# Altium PCB CANShield.PcbDoc
Units mil, origin at the board's own origin, x right, y up, seen from the top; angles counter-clockwise.
Board outline 2600 x 2086.61 mil, 2 copper layers (Top Layer, Bottom Layer), stack 61.756 mil thick; 20 components, 26 nets, 112 pads, 6 vias.
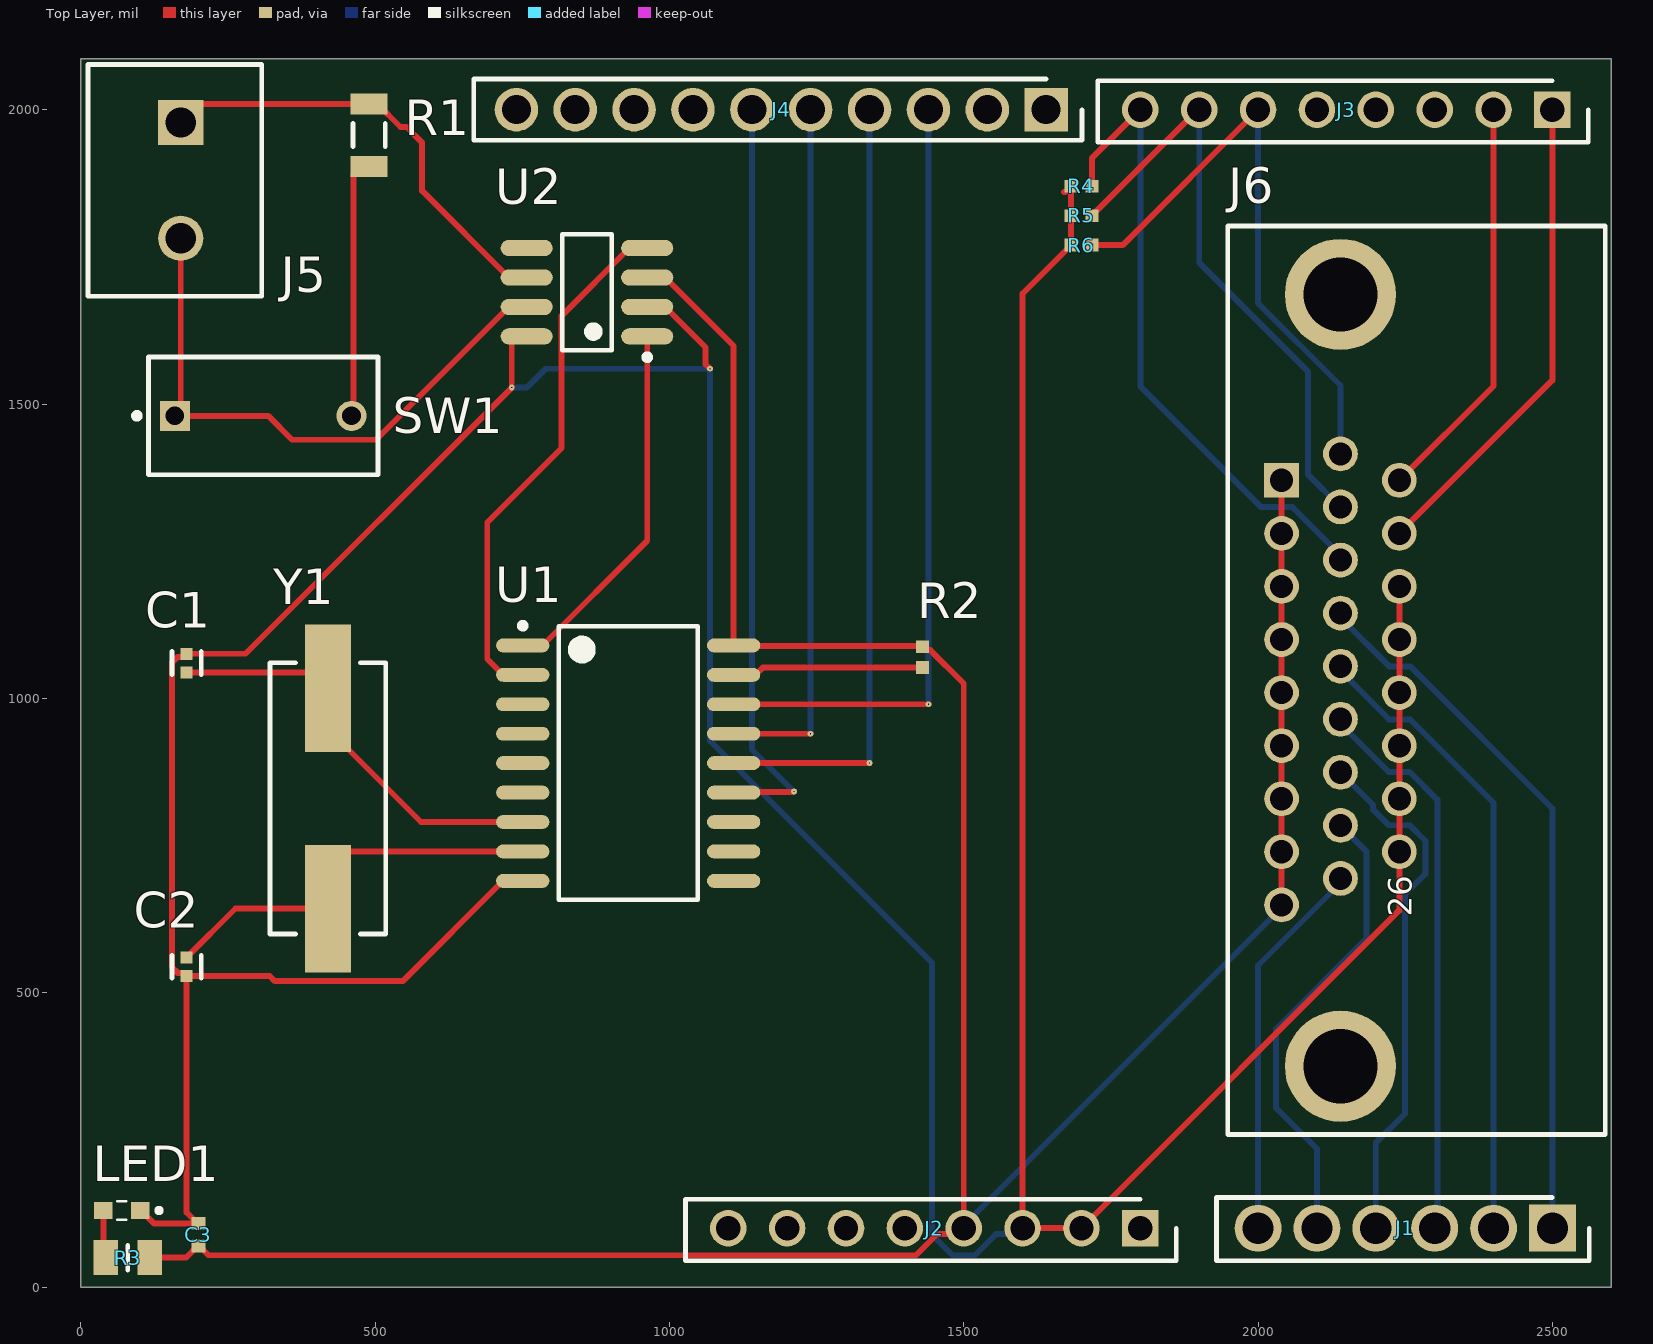
[diagram p0: Top Layer view]
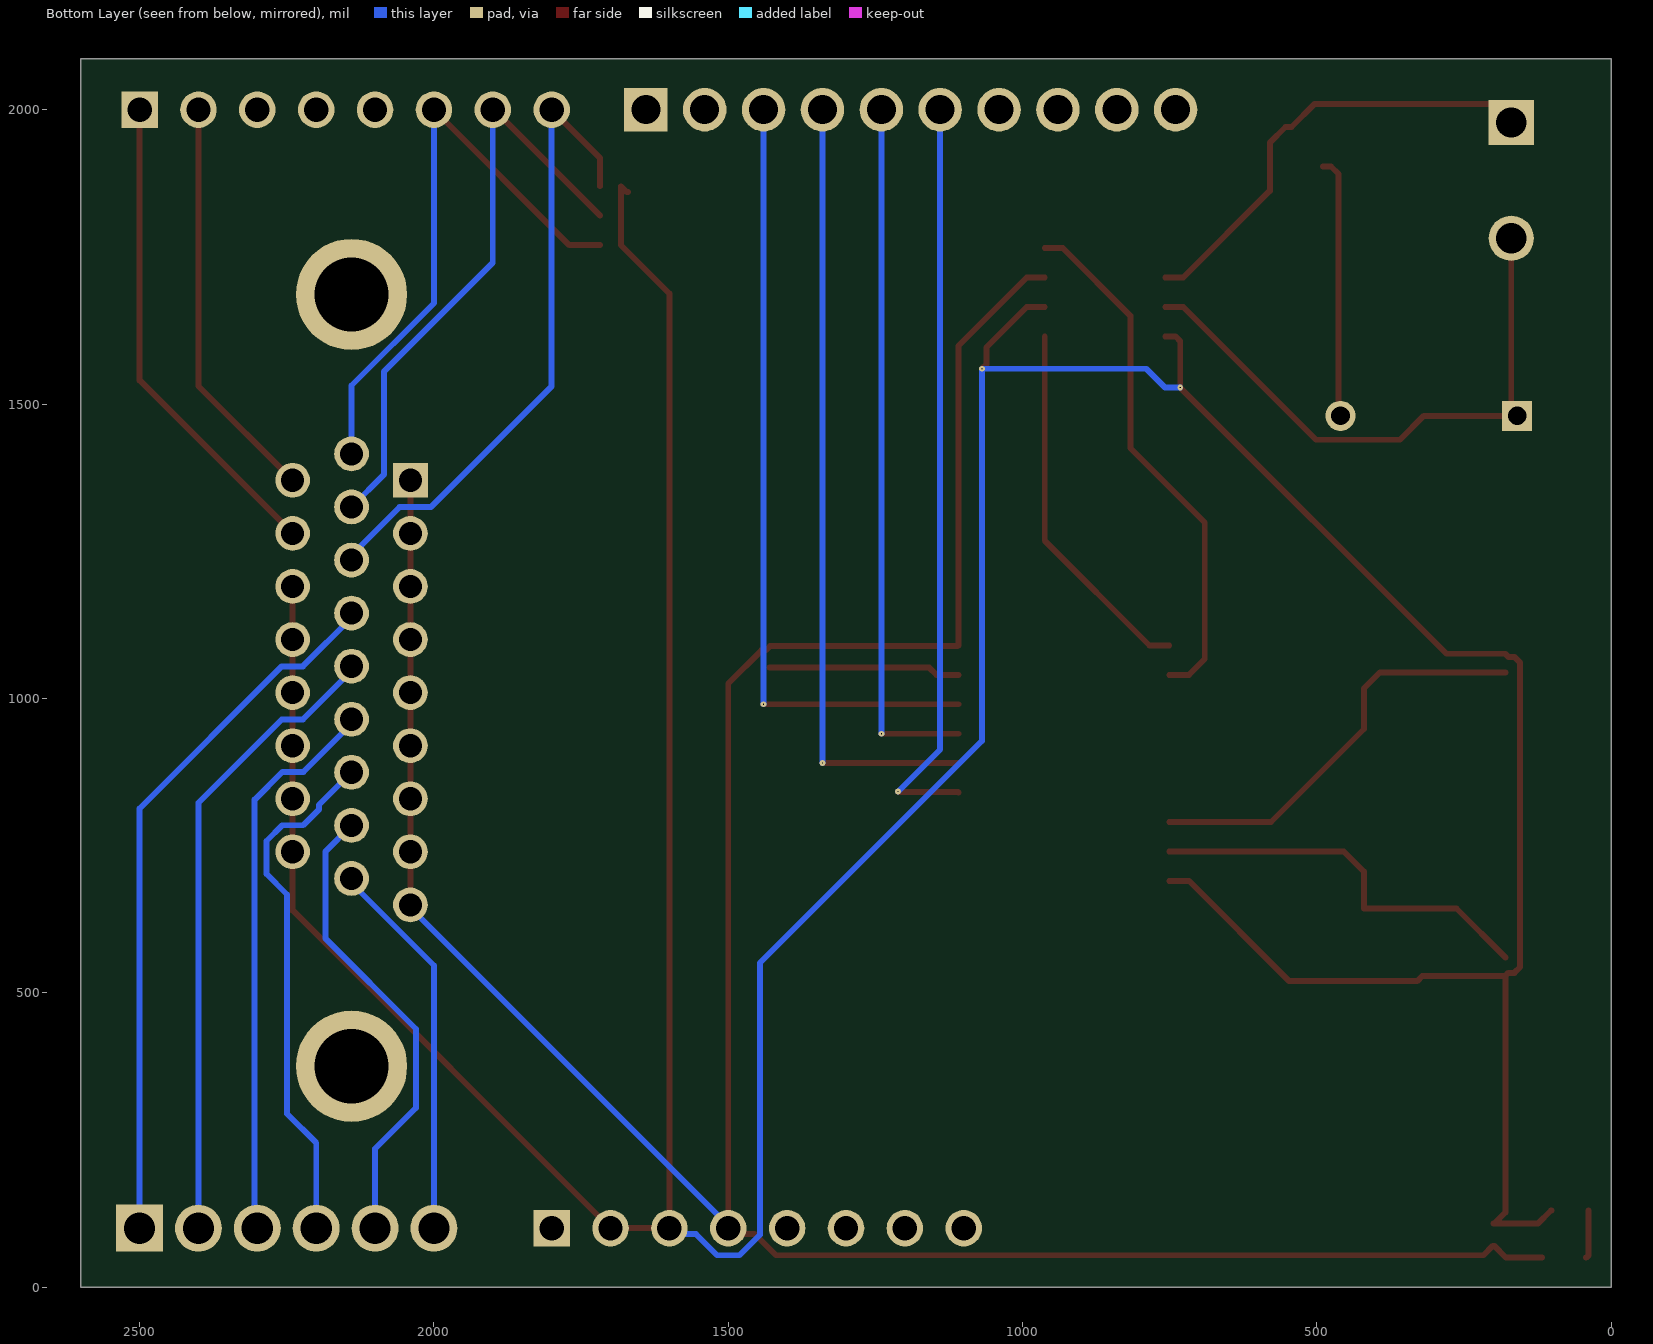
[diagram p1: Bottom Layer view, seen from below]

## Layer stack, top to bottom
Top Solder: solder mask 1, SM-001, Dk 4
Top Layer: signal copper 1.378
Dielectric 1: core 59, Core-043, Dk 4.3
Bottom Layer: signal copper 1.378
Bottom Solder: solder mask 1, SM-001, Dk 4

## Board outline
0,0 2600,0 2600,2086.61 0,2086.61

## Design rules (kind name [scope] priority, off if disabled: settings)
Clearance [All] p1: gap=10 ignorepadtopadclearanceinfootprint=FALSE except(0: Arc-Hole Track-Hole SMDPad-Hole THPad-Hole Via-Hole Fill-Hole Poly-Hole Region-Hole Text-Hole)
PolygonConnect [All] p1: connectstyle=Relief reliefconductorwidth=10 reliefentries=4 polygonreliefangle="90 Angle" airgapwidth=10
RoomDefinition CANShield [InComponentClass('CANShield')] p1: confinementstyle=ConfineIn formatcopy=TRUE lockcomponents=FALSE outline 0,0 2600,0 2600,2090 0,2090
RoutingVias [All] p1: holewidth=28 width=50 viastyle="Through Hole" minholewidth=28 minwidth=50 maxholewidth=28 maxwidth=50
SolderMaskExpansion [All] p1: expansion=4 istentingtop=FALSE
Width [All] p1: maxlimit=10 minlimit=10 preferedwidth=10
30 further rules are at their usual default settings.

## Components (designator, comment, footprint, x,y, rotation, side; value= is the part's Value field where it differs from the comment)
C1 "C0402C220J8HACTU" FP-C0402-BB-MFG 180,1060 r270 top value="22 pF"
C2 "C0402C220J8HACTU" FP-C0402-BB-MFG 180,544.25 r90 top value="22 pF"
C3 "10 uF" CAPC1005X55N 200,88.9 r270 top
J1 "PRT-09280" SHDR6W80P0X254_1X6_1579X250X865P 2500,100 r180 top
J2 "PRT-09279" SHDR8W87P0X254_1X8_2087X250X865P 1800,100 r180 top
J3 "PRT-09279" SHDR8W87P0X254_1X8_2087X250X865P 2500,2000 r180 top
J4 "PRT-11376" SHDR10W107P0X254_1X10_2595X250X865P 1640,2000 r180 top
J5 "691137710002" 691137710002 160,1880 r270 top
J6 "618026330923" 618026330923 2269.13,1030.71 r90 top
LED1 "150060RS55040" 150060RS55040 70,130 r180 top
R1 "120" RESC3216X60X45LL10T20 490,1956.85 r90 top
R2 "CRCW040210K0FKED" RESC1005X40X25NL05T05 1430,1070 r90 top
R3 "1k" RESC2013X55N 80,50 r180 top
R4 "CRCW040210K0FKED" RESC1005X40X25NL05T05 1700,1870 r0 top
R5 "CRCW040210K0FKED" RESC1005X40X25NL05T05 1700,1820 r0 top
R6 "CRCW040210K0FKED" RESC1005X40X25NL05T05 1700,1770 r0 top
SW1 "5161390-1" FP-5161390-1-MFG 310,1480 r270 top
U1 "MCP2515T-I/SO" SOIC-SO18_N 930,890 r0 top
U2 "TJA1050T/CM,118" NXP-SOT96-1_M 860,1690 r180 top
Y1 "FOXSDLF/080-20" FOX-HC49SDLF_V 420,830 r270 top

## Footprints (in the part's own frame and the unit in brackets; to place one, negate y for a bottom-side part, rotate by r counter-clockwise, add the part's x,y. Pads: shape width x height; smd on the part's side, far side on the other; paste and mask are expansions set on the pad)
150060RS55040 [mm]
  rect 0.8x0.75 smd: 1(-0.8,0) 2(0.8,0)
  silkscreen extent -1.7,-0.4 0.2,0.4
618026330923 [mm] "26 pins, right angled"
  rect 1.5x1.5 hole 1: 1(8.63,5.82)
  round 1.5 hole 1: 2(6.34,5.82) 3(4.05,5.82) 4(1.76,5.82) 5(-0.53,5.82) 6(-2.82,5.82) 7(-5.11,5.82) 8(-7.4,5.82) 9(-9.69,5.82) 10(9.77,3.28) 11(7.48,3.28) 12(5.19,3.28) 13(2.9,3.28) 14(0.61,3.28) 15(-1.68,3.28) 16(-3.97,3.28) 17(-6.26,3.28) 18(-8.55,3.28) 19(8.63,0.74) 20(6.34,0.74) 21(4.05,0.74) 22(1.76,0.74) 23(-0.53,0.74) 24(-2.82,0.74) 25(-5.11,0.74) 26(-7.4,0.74)
  round 4.8 hole 3.2: M1(-16.65,3.28) M2(16.65,3.28)
  silkscreen extent -19.6,-8.15 19.6,8.15, body extent -19.6,-14.15 19.6,8.15, height 12.55
691137710002 [mm] "Horizontal Cable Entry with Pressure Clamp, pitch 5mm, 02p"
  rect 1.95x1.95 hole 1.3: 1(-2.5,0.25)
  round 1.95 hole 1.3: 2(2.5,0.25)
  silkscreen extent -5,-3.75 5,3.75, body extent -5,-3.75 5,3.75, height 11.6
CAPC1005X55N [mm]
  rect 0.56x0.62 smd: 1(-0.48,0) 2(0.48,0)
  body extent -0.5,-0.25 0.5,0.25, height 0.55
FOX-HC49SDLF_V [mm] "SMD, 2-Leads, Body 5x11.7mm"
  rect 5.5x2 smd: 1(-4.75,0) 2(4.75,0)
  silkscreen extent -5.85,-2.5 5.85,2.5, body extent -6.15,-2.35 6.15,2.35, height 4.34
FP-5161390-1-MFG [mm]
  rect 1.3x1.3 hole 0.8 paste-1000 mask+0: 1(0,-3.81)
  round 1.3 hole 0.8 paste-1000 mask+0: 2(0,3.81)
  silkscreen extent -2.54,-5.57 2.54,4.95, body extent -2.64,-5.05 2.64,5.05, height 0.25
FP-C0402-BB-MFG [mm]
  rect 0.52x0.52 smd paste+0 mask+0: 1(-0.4,0) 2(0.4,0)
  silkscreen extent -0.5,-0.64 0.5,0.64, body extent -0.8,-0.4 0.8,0.4, height 0.25
NXP-SOT96-1_M [mm] "SOIC, 8-Leads, Body 5x4mm, Pitch 1.27mm, IPC Low Density"
  oval 2.25x0.7 smd: 1(-2.6,1.905) 2(-2.6,0.635) 3(-2.6,-0.635) 4(-2.6,-1.905) 5(2.6,-1.905) 6(2.6,-0.635) 7(2.6,0.635) 8(2.6,1.905)
  silkscreen extent -2.73,-2.5 1.07,2.93, body extent -2,-2.5 2,2.5, height 1.75
RESC1005X40X25NL05T05 [mm] "Chip Resistor, 2-Leads, Body 1.00x0.50mm, IPC Medium Density"
  rect 0.55x0.55 smd: 1(-0.45,0) 2(0.45,0)
  body extent -0.53,-0.27 0.53,0.28, height 0.4
RESC2013X55N [mm]
  rect 1.05x1.5 smd: 1(-0.95,0) 2(0.95,0)
  silkscreen extent 0,-0.54 0,0.54, body extent -1,-0.64 1,0.64, height 0.55
RESC3216X60X45LL10T20 [mm] "Chip Resistor, 2-Leads, Body 3.20x1.60mm, IPC High Density"
  rect 0.9x1.6 smd: 1(-1.35,0) 2(1.35,0)
  silkscreen extent -0.5,-0.7 0.5,0.7, body extent -1.65,-0.85 1.65,0.85, height 0.6
SHDR6W80P0X254_1X6_1579X250X865P [mm]
  rect 2.025x2.025 hole 1.35: 1(0,0)
  round 2.025 hole 1.35: 2(2.54,0) 3(5.08,0) 4(7.62,0) 5(10.16,0) 6(12.7,0)
  silkscreen extent -1.6,-1.33 14.5,1.4
SHDR8W87P0X254_1X8_2087X250X865P [mm]
  rect 1.575x1.575 hole 1.05: 1(0,0)
  round 1.575 hole 1.05: 2(2.54,0) 3(5.08,0) 4(7.62,0) 5(10.16,0) 6(12.7,0) 7(15.24,0) 8(17.78,0)
  silkscreen extent -1.54,-1.25 19.63,1.4
SHDR10W107P0X254_1X10_2595X250X865P [mm]
  rect 1.875x1.875 hole 1.25: 1(0,0)
  round 1.875 hole 1.25: 2(2.54,0) 3(5.08,0) 4(7.62,0) 5(10.16,0) 6(12.7,0) 7(15.24,0) 8(17.78,0) 9(20.32,0) 10(22.86,0)
  silkscreen extent -1.54,-1.33 24.71,1.33
SOIC-SO18_N [mm] "SOIC, 18-Leads, Body 11.6x7.5mm, Pitch 1.27mm, IPC Medium Density"
  oval 2.3x0.6 smd: 1(-4.55,5.08) 2(-4.55,3.81) 3(-4.55,2.54) 4(-4.55,1.27) 5(-4.55,0) 6(-4.55,-1.27) 7(-4.55,-2.54) 8(-4.55,-3.81) 9(-4.55,-5.08) 10(4.55,-5.08) 11(4.55,-3.81) 12(4.55,-2.54) 13(4.55,-1.27) 14(4.55,0) 15(4.55,1.27) 16(4.55,2.54) 17(4.55,3.81) 18(4.55,5.08)
  silkscreen extent -4.67,-5.9 3,6.05, body extent -3.8,-5.87 3.8,5.87, height 2.65

## Part data
C1 C2: library part CMP-03020-002266-1, "C0402 22 pF X8R 5.00% 10 V", Capacitance="22 pF", Manufacturer=Kemet, Package=C0402-BB, Temperature="-55°C to +125°C", Temperature Characteristic=X8R, Temperature Coefficient=15%, Temperature Range High=+125°C, Temperature Range Low=-55°C, Tolerance=0.05, Voltage Rating="10 V", Automotive=No, Category=Cap, ComponentLink2Description=Datasheet, ComponentLink2URL=https://content.kemet.com/datasheets/KEM_C1002_X7R_SMD.pdf, Device Class L1="Passive Components", Device Class L2=Capacitors, Device Class L3="Ceramic Capacitors", Height=0.55mm, Ipc Land Pattern Name=CAPC10050X50, Lead Free=Yes, Manufacturer Part Number=C0402C220J8HACTU, Material=Ceramic, Octopart=https://octopart.com/c0402c220j8hactu-kemet-88724303, RoHS=TRUE
C3: library part 0402X106M6R3CT, "Capacitor", Manufacturer_Name="Walsin Technology Corporation", Mouser Part Number=791-0402X106M6R3CT, Arrow Part Number=0402X106M6R3CT, Datasheet Link=https://mouser.componentsearchengine.com/Datasheets/1/0402X106M6R3CT.pdf, Height=0.55mm, Manufacturer_Part_Number=0402X106M6R3CT, Mouser Price/Stock=https://www.mouser.co.uk/ProductDetail/Walsin/0402X106M6R3CT?qs=K66U1JmYfS7Y7bXr0va0Xw%3D%3D
J1: "Connector", Manufacturer_Name=SparkFun, Mouser Part Number=474-PRT-09280, Arrow Part Number=PRT-09280, Arrow Price/Stock=https://www.arrow.com/en/products/prt-09280/sparkfun-electronics, Datasheet Link=https://www.sparkfun.com/products/9280, Height=8.65mm, Manufacturer_Part_Number=PRT-09280, Mouser Price/Stock=https://www.mouser.co.uk/ProductDetail/SparkFun/PRT-09280?qs=WyAARYrbSnZbYI2JbCpVjQ%3D%3D
J2 J3: "Capacitor", Manufacturer_Name=SparkFun, Mouser Part Number=474-PRT-09279, Arrow Part Number=PRT-09279, Arrow Price/Stock=https://www.arrow.com/en/products/prt-09279/sparkfun-electronics, Datasheet Link=https://cdn.sparkfun.com/datasheets/Prototyping/SP-140520-XX-001.pdf, Height=8.65mm, Manufacturer_Part_Number=PRT-09279, Mouser Price/Stock=https://www.mouser.co.uk/ProductDetail/SparkFun/PRT-09279?qs=WyAARYrbSnZoWn%2FpXY8lrw%3D%3D
J4: "Capacitor", Manufacturer_Name=SparkFun, Mouser Part Number=474-PRT-11376, Arrow Part Number=PRT-11376, Arrow Price/Stock=https://www.arrow.com/en/products/prt-11376/sparkfun-electronics, Datasheet Link=https://cdn.sparkfun.com/datasheets/Prototyping/SP-140520-XX-001.pdf, Height=8.65mm, Manufacturer_Part_Number=PRT-11376, Mouser Price/Stock=https://www.mouser.co.uk/ProductDetail/SparkFun/PRT-11376?qs=WyAARYrbSnZQXyABk0oWeA%3D%3D
J5: library part CMP-1502-03324-1, "Series 1377 - 5.00 mm Horizontal Entry with Pressure Clamp WR-TBL, 2 pin", Manufacturer="Wurth Elektronik", Operating Temperature=-30to120degC, Datasheet URL=http://katalog.we-online.de/pbs/datasheet/691137710002.pdf, Manufacturer URL=http://www.we-online.de, Mounting Technology=THT, Package Reference=691137710002, Packaging=Box, Part Number=691137710002, Pin Number=2, Pitch=5.00mm, Publisher=WurthElektronik
J6: library part CMP-1502-00217-1, "Female High Density PCB Connector with Hex Screw WR-DSUB, Angled, 26 pins", Contact Resistance=30mOhm, Manufacturer="Wurth Elektronik", Operating Temperature=-40to85degC, Rated Current=3A, Working Voltage=60VAC, Datasheet URL=https://katalog.we-online.de/em/datasheet/6180xx330923.pdf, Gender=Female, Manufacturer URL=http://www.we-online.de, Mounting Technology=THT, Orientation=Angled, Package Reference=618026330923, Packaging=Tray, Part Number=618026330923, Pin Number=26, Publisher=WurthElektronik
LED1: "LED", Manufacturer_Name="Wurth Elektronik", Mouser Part Number=710-150060RS55040, Arrow Part Number=150060RS55040, Datasheet Link=http://katalog.we-online.de/led/datasheet/150060RS55040.pdf, Height=0mm, Manufacturer_Part_Number=150060RS55040, Mouser Price/Stock=https://www.mouser.co.uk/ProductDetail/Wurth-Elektronik/150060RS55040?qs=8Aam6%252B7C6HHnMZFlrlTntA%3D%3D
R1: library part CMP-2003-04838-1, Manufacturer="Vishay Dale", Part Number=CRCW1206120RFKEA
R2 R4 R5 R6: library part CMP-2002-08135-1, Manufacturer="Vishay Dale", Part Number=CRCW040210K0FKED
R3: library part RGA2012P-102-B-T1, "Resistor", Manufacturer_Name=Susumu, Mouser Part Number=754-RGA2012P-102BT1, Arrow Part Number=RGA2012P-102-B-T1, Datasheet Link=https://componentsearchengine.com/Datasheets/1/RGA2012P-102-B-T1.pdf, Height=0.55mm, Manufacturer_Part_Number=RGA2012P-102-B-T1, Mouser Price/Stock=https://www.mouser.co.uk/ProductDetail/Susumu/RGA2012P-102-B-T1?qs=bZr6mbWTK5kDA0FAdzRgYA%3D%3D
SW1: library part CMP-03400-000007-1, "Switch DIP OFF ON SPST 1 Top Slide 25A 50VDC PC Pins 2.54mm Thru-Hole Box/Carton", Contact Current Rating=25mA, Manufacturer=TE, Temperature="-25°C to +70°C", Temperature Range High=+70°C, Temperature Range Low=-25°C, Voltage Rating Dc=50V, Automotive=No, Category=Switch, ComponentLink2Description=Datasheet, ComponentLink2URL=https://www.te.com/usa-en/product-5161390-1.html?te_bu=Cor&te_type=other&te_campaign=oct_glo_cor-oct-global-oth-prtnr-fy19-oct-octo-buy-bom_sma-298_2&elqCampaignId=35216, Device Class L1=Electromechanical, Device Class L2=Switches, Device Class L3="DIP Switches", Electromechanical Life=2000Cycles, Height=8.5mm, Lead Free=Yes, Manufacturer Part Number=5161390-1, Mount="Through Hole", Mouser Description="Switch DIP OFF ON SPST 1 Top Slide 25A 50VDC PC Pins 2.54mm Thru-Hole Box/Carton", Number Of Circuits=1, Octopart=https://octopart.com/5161390-1-te+connectivity-46507634, Package=5161390-1, RoHS=TRUE, Throw Configuration=SPST
U1: library part CMP-0186-00139-2, "Stand-Alone CAN Controller With SPI Interface, 18-Pin SOIC, Industrial Temperature, Tape and Reel", Code_JEDEC=MS-013, ComponentLink1Description="Manufacturer URL", ComponentLink1URL=http://www.microchip.com/, ComponentLink2Description=Datasheet, ComponentLink2URL=http://ww1.microchip.com/downloads/en/DeviceDoc/21801f.pdf, ComponentLink3Description="Package Specification", ComponentLink3URL=http://www.microchip.com/stellent/groups/techpub_sg/documents/packagingspec/en012702.pdf, DatasheetVersion="revF, Oct-2010", PackageDescription="18-Lead Plastic Small Outline (SO) - Wide 7.50mm Body [SOIC]", PackageReference=SOIC-SO18, PackageVersion="revBB, Aug-2009", RevisionNote="URLs added. DatasheetVersion updated."
U2: library part CMP-2000-04923-1, "High speed CAN transceiver, 4.75 to 5.25 V, -40 to 150 degC, 8-Pin SO (SOT96-1), RoHS, Tape and Reel", Manufacturer="NXP Semiconductors", Package / Case="8-SOIC(0.154\",3.90mmWidth)", Package Description="8-Pin Small Outline Integrated Circuit, Body 4.9 x 3.9 mm, Pitch 1.27 mm", Package Reference=SOT96-1, Standard Package=1, Supplier Device Package=8-SO, Voltage - Supply=4.75V~5.25V, <PCN>=http://media.digikey.com/pdf/PCNs/NXP/201209019F04_TJA1050_Obs.pdf, Category=IntegratedCircuits(ICs), Datasheet URL=http://www.nxp.com/documents/data_sheet/TJA1050.pdf, Datasheet Version="Rev. 4, 10/2003", Duplex=Half, Dynamic Catalog=CANTransceivers, Family=Interface-Drivers,Receivers,Transceivers, Manufacturer URL=http://www.nxp.com/, Minimum Quantity=Transceiver, Mounting Type=SurfaceMount, Number of Drivers/Receivers=1/1, Other Names=568-10292-1, Package/Case="8-SOIC(0.154\",3.90mmWidth)", Packaging=CutTape(CT), PCN Obsolescence="TJA105028/Apr/2013 /  / MultipleDevices19/Apr/2013", PCN Packaging=LighterPackingReels30/Mar/2014, Product Training Modules=CANandLINBusTransceiver, Protocol=CAN, Quantity Available=CutTape(CT)AlternatePackaging, Receiver Hysteresis=70mV, Type=Transceiver
Y1: library part CMP-2100-03639-1, "Resistance Weld Crystal, 8 MHz, +/- 30 ppm, -20 to 70 degC, 2-Pin SMD, RoHS, Tape and Reel", Case/Package=SMD/SMT, ESR (Equivalent Series Resistance)=80Ohm, Frequency=8MHz, Frequency Stability=50ppm, Frequency Tolerance=30ppm, Load Capacitance=20pF, Manufacturer="FOX Electronics", Max Operating Temperature=70degC, Min Operating Temperature=-20degC, Package Description="2-Pin Surface Mount Device, Body 5 x 11.7 mm", Package Quantity=1000, Package Reference=HC49SDLF, Datasheet URL=http://www.foxonline.com/pdfs/hc49sdlf.pdf, Datasheet Version=42064.0, Depth=5mm, Height=4.5mm, Lead Free=LeadFree, Length=11.7mm, Manufacturer URL=http://www.foxonline.com/, Mount=SurfaceMount, Number of Pins=2, Packaging=TapeandReel, Radiation Hardening=No, REACH SVHC=NoSVHC, RoHSCompliant=True, Series Resistance=80Ohm, Termination=SMD/SMT, Tolerance=50ppm, Width=5mm

## Via types
v1: diameter 10, hole 0, Top Layer to Bottom Layer, 6 vias

## Nets (pads, with @x,y where several pads share a name; then routed paths per layer and width w, separated by ;. In a path a pad name is that pad's centre, name@x,y a point inside that pad or via, vN(x,y) a via of type N, cw(c..) or ccw(c..) an arc to the next point about the centre after c; other vN are vias at no path point)
+5: C3.2 J2.4 J6.1 J6.2 J6.3 J6.4 J6.5 J6.6 J6.7 J6.8 J6.9 R2.2 R3.1 U1.18 U2.3 | length 4961.9
  Top Layer w10: R3.1 178.82,50 198.82,70 C3.2 201.18,70 217.19,54 1419.06,54 1455.11,90.05 1490.05,90.05 J2.4 1500,1025.15 1443.26,1081.89 1435.83,1081.89 R2.2 1428.86,1088.86 1110.28,1088.86 U1.18 1109.13,1598.74 992.87,1715 U2.3 ; J6.9@2040,644.61 J6.9 J6.8 J6.7 J6.6 J6.5 J6.4 J6.3 J6.2 J6.1
  Bottom Layer w10: J2.4 1500,104.61 2040,644.61 J6.9
GND: C1.1 C2.1 C3.1 J2.2 J2.3 J6.21 J6.22 J6.23 J6.24 J6.25 J6.26 LED1.1 R4.1 R5.1 R6.1 U1.9 U2.2 U2.8 | length 8175.1
  Top Layer w10: LED1.1 102.48,130 124.68,107.8 C3.1@198.82,107.8 ; C3.1 C3.1@198.82,107.8 ; U1.9 717.4,690 547.13,519.72 329.8,519.72 321.02,528.5 C2.1 ; U2.8 740.24,1615 732.13,1606.89 v1(732.13,1527.87) 280,1075.75 C1.1 174.76,1070.51 164.57,1070.51 154.76,1060.7 154.76,543.55 164.57,533.74 174.76,533.74 C2.1 ; U2.2 992.87,1665 1061.48,1596.39 1061.48,1567.65 v1(1069.13,1560) ; 1670,1860 1672.28,1860 R4.1 R5.1 R6.1 1600,1687.72 J2.3 J2.2 2240,640 J6.26 J6.25 J6.24 J6.23 J6.22 J6.21 ; C2.1 180,126.61 C3.1@198.82,107.8
  Bottom Layer w10: v1(732.13,1527.87) 757.87,1527.87 790,1560 v1(1069.13,1560) 1069.13,927.58 1446,550.71 1446,88.94 1480.94,54 1519.06,54 1555.11,90.05 1590.05,90.05 J2.3
NetC1_2: C1.2 U1.7 Y1.1 | length 716.5
  Top Layer w10: C1.2 392.76,1044.25 Y1.1 420,948.11 578.11,790 U1.7
NetC2_2: C2.2 U1.8 Y1.2 | length 682.1
  Top Layer w10: C2.2 262.99,642.99 Y1.2 420,705.63 454.37,740 U1.8
NetJ1_1: J1.1 J6.13 | length 1215
  Bottom Layer w10: J6.13 2140,1137.03 2222.66,1054.37 2258.44,1054.37 2500,812.81 J1.1
NetJ1_2: J1.2 J6.14 | length 1083.4
  Bottom Layer w10: J6.14 2140,1046.87 2222.66,964.21 2258.44,964.21 2400,822.66 J1.2
NetJ1_3: J1.3 J6.15 | length 955.6
  Bottom Layer w10: J6.15 2140,956.71 2221.56,875.16 2257.34,875.16 2304.53,827.97 2304.53,104.53 J1.3
NetJ1_4: J1.4 J6.16 | length 890.2
  Bottom Layer w10: J6.16 2195.47,818.94 2195.47,811.08 2222.11,784.45 2257.89,784.45 2284.53,757.81 2284.53,701.95 2249.49,666.91 2249.49,294.45 2200,244.96 J1.4
NetJ1_5: J1.5 J6.17 | length 795.3
  Bottom Layer w10: J1.5 2100,234.96 2030.51,304.45 2030.51,438.44 2184.53,592.46 2184.53,739.72 J6.17
NetJ1_6: J1.6 J6.18 | length 652.1
  Bottom Layer w10: J1.6 2000,546.24 2140,686.24 J6.18
NetJ3_1: J3.1 J6.20 | length 827.4
  Top Layer w10: J6.20 2500,1540.32 J3.1
NetJ3_2: J3.2 J6.19 | length 695.8
  Top Layer w10: J6.19 2400,1530.47 J3.2
NetJ3_6: J3.6 J6.10 R6.2 | length 1020.2
  Top Layer w10: R6.2 1770,1770 J3.6
  Bottom Layer w10: J3.6 2000,1671.38 2140,1531.38 J6.10
NetJ3_7: J3.7 J6.11 R5.2 | length 1031.1
  Top Layer w10: R5.2 1897.72,2000 J3.7
  Bottom Layer w10: J3.7 1900,1740 2084.53,1555.47 2084.53,1380.67 J6.11
NetJ3_8: J3.8 J6.12 R4.2 | length 1101
  Top Layer w10: R4.2 1717.72,1917.72 J3.8
  Bottom Layer w10: J3.8 1800,1530.2 2005.36,1324.84 2058.44,1324.84 2140,1243.29 J6.12
NetJ4_3: J4.3 U1.16 | length 1340.9
  Top Layer w10: U1.16 v1(1440,990)
  Bottom Layer w10: v1(1440,990) J4.3
NetJ4_4: J4.4 U1.14 | length 1340.9
  Top Layer w10: U1.14 v1(1340,890)
  Bottom Layer w10: v1(1340,890) J4.4
NetJ4_5: J4.5 U1.15 | length 1190.9
  Top Layer w10: U1.15 v1(1240,940)
  Bottom Layer w10: v1(1240,940) J4.5
NetJ4_6: J4.6 U1.13 | length 1291.2
  Top Layer w10: U1.13 1109.96,840.83 1210.8,840.83 v1(1211.63,841.65)
  Bottom Layer w10: J4.6 1140,913.28 v1(1211.63,841.65)
NetJ5_1: J5.1 R1.2 U2.6 | length 771.1
  Top Layer w10: J5.1 201.42,2010 R1.2 503.78,2010 543.07,1970.71 553.43,1970.71 580,1944.14 580,1862.13 727.13,1715 U2.6
NetJ5_2: J5.2 SW1.1 U2.7 | length 1013.5
  Top Layer w10: J5.2 169.84,1489.84 SW1.1 318.39,1480 358.98,1439.41 501.54,1439.41 727.13,1665 U2.7
NetLED1_2: LED1.2 R3.2 | length 81.7
  Top Layer w10: LED1.2 38.5,54.09 R3.2
NetR1_1: R1.1 SW1.2 | length 444.2
  Top Layer w10: SW1.2 463.5,1483.5 463.5,1890.98 476.22,1903.7 R1.1
NetR2_1: R2.1 U1.17 | length 326
  Top Layer w10: U1.17 1146.28,1040 1158.57,1052.28 R2.1
NetU1_1: U1.1 U2.1 | length 632.2
  Top Layer w10: U1.1 784.33,1090 962.36,1268.03 U2.1
NetU1_2: U1.2 U2.4 | length 900
  Top Layer w10: U1.2 717.4,1040 690.59,1066.81 690.59,1298.94 816.93,1425.28 816.93,1650.08 931.85,1765 U2.4
pads on no net: J2.1 J2.5 J2.6 J2.7 J2.8 J3.3 J3.4 J3.5 J4.1 J4.2 J4.7 J4.8 J4.9 J4.10 J6.M1 J6.M2 U1.3 U1.4 U1.5 U1.6 U1.10 U1.11 U1.12 U2.5

## Text inside footprints (layer, text, board x,y; h text height)
J6: Top Overlay "26" at 2261.26,629.13 h40 r90; Mechanical 2 "PCB Edge" at 2647.87,896.85 h40 r90